# Altium PCB uTCA_MCH_PCB3_template.PcbDoc
Units mm, origin at the board's own origin, x right, y up, seen from the top; angles counter-clockwise.
Board outline 182.75 x 75.8 mm, 2 copper layers (Top Layer, Bottom Layer); 1 components, 0 nets, 291 pads, 0 vias.
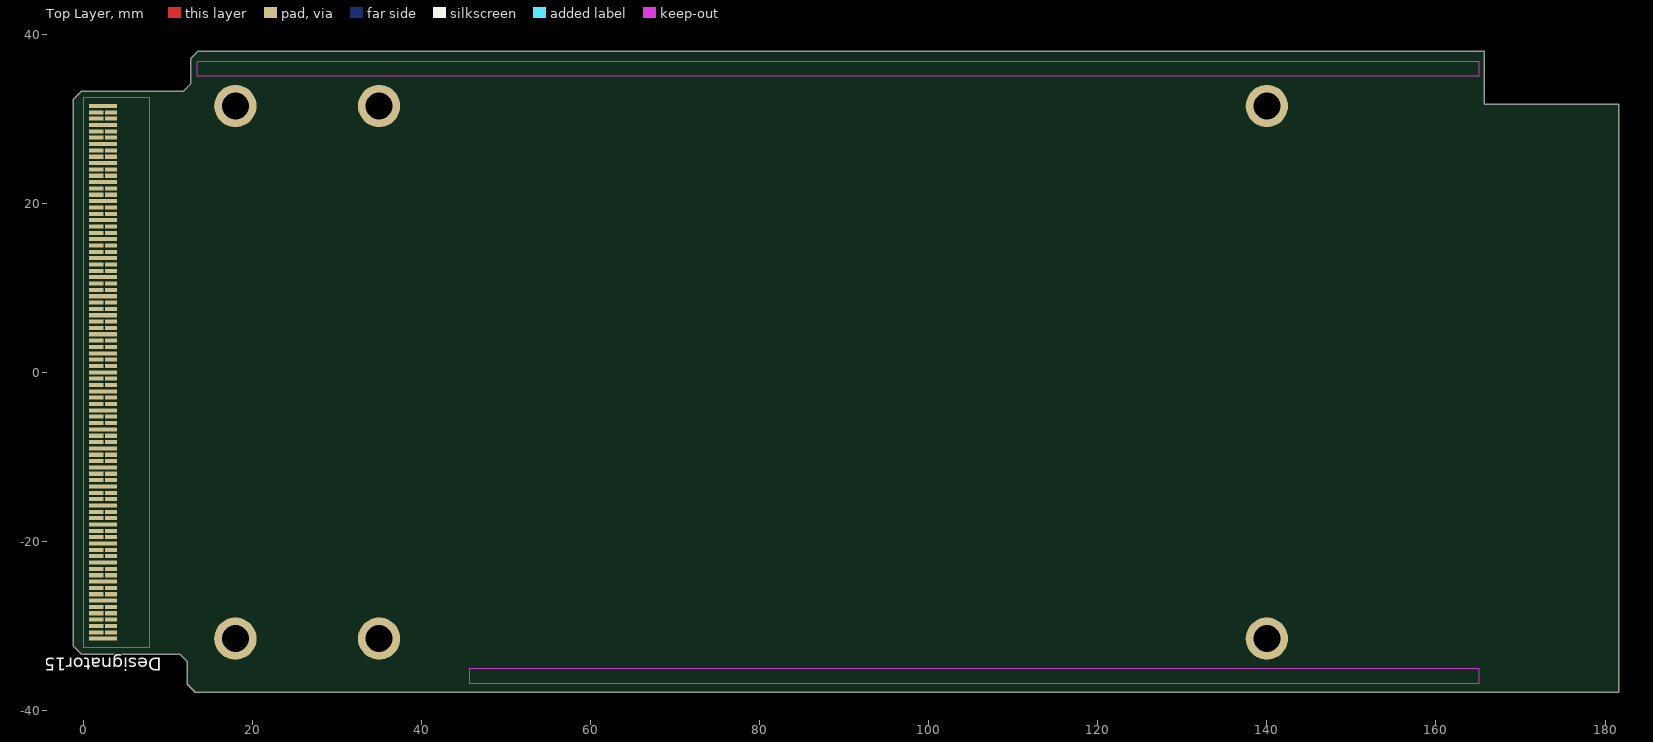
[diagram p0: Top Layer view]
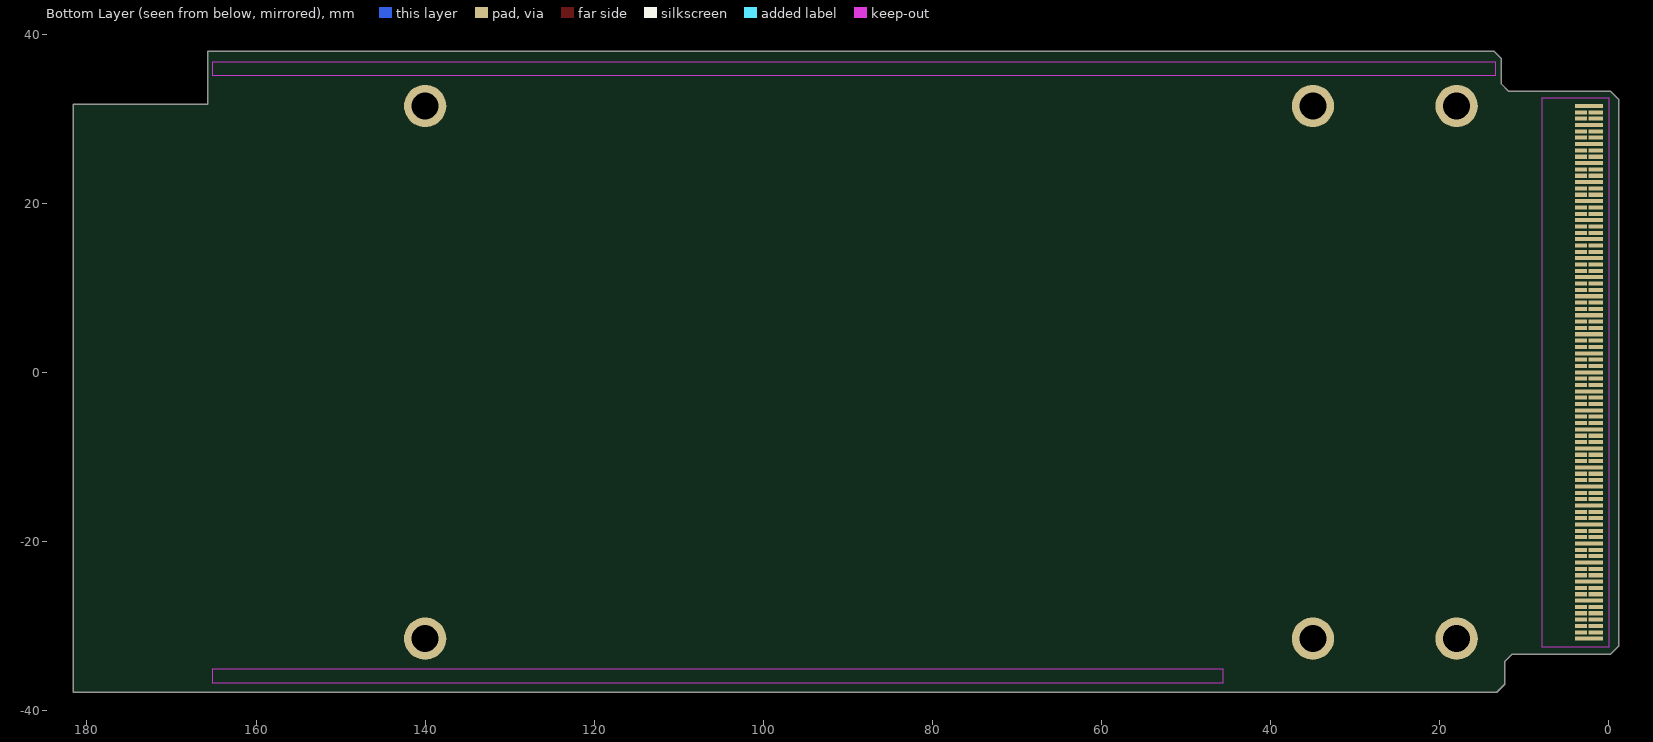
[diagram p1: Bottom Layer view, seen from below]

## Layer stack, top to bottom
Top Layer: signal copper 0.0356
Dielectric: dielectric 0.32, FR-4, Dk 4.8
Bottom Layer: signal copper 0.0356

## Board outline
-1.15,32.3 -0.2,33.25 11.85,33.25 12.75,34.15 12.75,37.15 13.55,37.95 165.7,37.95 165.7,31.7 181.6,31.7 181.6,-37.85 13.25,-37.85 12.3,-36.9 12.3,-34.2 11.45,-33.35 -0.2,-33.35 -1.15,-32.4

## Design rules (kind name [scope] priority, off if disabled: settings)
Clearance [All] p1: gap=0.254
HoleSize [All] p1: absolutevalues=TRUE maxlimit=3 minlimit=0.025 maxpercent=80.000 minpercent=20.000
PolygonConnect [All] p1: connectstyle=Relief reliefconductorwidth=0.254 reliefentries=4 polygonreliefangle="90 Angle"
RoutingVias [All] p1: holewidth=0.711 width=1.27 viastyle="Through Hole" minholewidth=0.711 minwidth=1.27 maxholewidth=0.711 maxwidth=1.27
SolderMaskExpansion [All] p1: expansion=0.102
TestPointUsage [All] p1: valid=0 allowmultiple=FALSE
Testpoint [All] p1: side=15 testpointundercomponent=TRUE minsize=1.016 maxsize=2.54 preferedsize=1.524 minholesize=0 maxholesize=1.016 preferedholesize=0.813 testpointgrid=0.025 style=1023 order=0-112345678
Width [All] p1: maxlimit=0.254 minlimit=0.254 preferedwidth=0.254
18 further rules are at their usual default settings.

## Components (designator, comment, footprint, x,y, rotation, side; value= is the part's Value field where it differs from the comment)
Designator15 "Comment" UTCA_MCH_TONGUE2_3_4 0,0 r0 top locked

## Footprints (in the part's own frame and the unit in brackets; to place one, negate y for a bottom-side part, rotate by r counter-clockwise, add the part's x,y. Pads: shape width x height; smd on the part's side, far side on the other; paste and mask are expansions set on the pad)
UTCA_MCH_TONGUE2_3_4 [mm] "uTCA MTCA.0 MCH tongue connector"
  rect 3.3x0.48 smd: 1(2.35,-31.5) 7(2.35,-27) 10(2.35,-24.75) 13(2.35,-22.5) 16(2.35,-20.25) 19(2.35,-18) 22(2.35,-15.75) 25(2.35,-13.5) 28(2.35,-11.25) 31(2.35,-9) 34(2.35,-6.75) 37(2.35,-4.5) 40(2.35,-2.25) 43(2.35,0) 46(2.35,2.25) 49(2.35,4.5) 52(2.35,6.75) 55(2.35,9) 58(2.35,11.25) 61(2.35,13.5) 64(2.35,15.75) 67(2.35,18) 70(2.35,20.25) 73(2.35,22.5) 76(2.35,24.75) 79(2.35,27) 82(2.35,29.25) 85(2.35,31.5)
  rect 1.4x0.48 smd: 2(3.3,-30.75) 3(3.3,-30) 4(3.3,-29.25) 5(3.3,-28.5) 6(3.3,-27.75) 8(3.3,-26.25) 9(3.3,-25.5) 11(3.3,-24) 12(3.3,-23.25) 14(3.3,-21.75) 15(3.3,-21) 17(3.3,-19.5) 18(3.3,-18.75) 20(3.3,-17.25) 21(3.3,-16.5) 23(3.3,-15) 24(3.3,-14.25) 26(3.3,-12.75) 27(3.3,-12) 29(3.3,-10.5) 30(3.3,-9.75) 32(3.3,-8.25) 33(3.3,-7.5) 35(3.3,-6) 36(3.3,-5.25) 38(3.3,-3.75) 39(3.3,-3) 41(3.3,-1.5) 42(3.3,-0.75) 44(3.3,0.75) 45(3.3,1.5) 47(3.3,3) 48(3.3,3.75) 50(3.3,5.25) 51(3.3,6) 53(3.3,7.5) 54(3.3,8.25) 56(3.3,9.75) 57(3.3,10.5) 59(3.3,12) 60(3.3,12.75) 62(3.3,14.25) 63(3.3,15) 65(3.3,16.5) 66(3.3,17.25) 68(3.3,18.75) 69(3.3,19.5) 71(3.3,21) 72(3.3,21.75) 74(3.3,23.25) 75(3.3,24) 77(3.3,25.5) 78(3.3,26.25) 80(3.3,27.75) 81(3.3,28.5) 83(3.3,30) 84(3.3,30.75)
  rect 1.7x0.48 smd: 3mate(1.55,-30.75) 3mate(1.55,-30) 3mate(1.55,-29.25) 3mate(1.55,-28.5) 3mate(1.55,-27.75) 3mate(1.55,-26.25) 3mate(1.55,-25.5) 3mate(1.55,-24) 3mate(1.55,-23.25) 3mate(1.55,-21.75) 3mate(1.55,-21) 3mate(1.55,-19.5) 3mate(1.55,-18.75) 3mate(1.55,-17.25) 3mate(1.55,-16.5) 3mate(1.55,-15) 3mate(1.55,-14.25) 3mate(1.55,-12.75) 3mate(1.55,-12) 3mate(1.55,-10.5) 3mate(1.55,-9.75) 3mate(1.55,-8.25) 3mate(1.55,-7.5) 3mate(1.55,-6) 3mate(1.55,-5.25) 3mate(1.55,-3.75) 3mate(1.55,-3) 3mate(1.55,-1.5) 3mate(1.55,-0.75) 3mate(1.55,0.75) 3mate(1.55,1.5) 3mate(1.55,3) 3mate(1.55,3.75) 3mate(1.55,5.25) 3mate(1.55,6) 3mate(1.55,7.5) 3mate(1.55,8.25) 3mate(1.55,9.75) 3mate(1.55,10.5) 3mate(1.55,12) 3mate(1.55,12.75) 3mate(1.55,14.25) 3mate(1.55,15) 3mate(1.55,16.5) 3mate(1.55,17.25) 3mate(1.55,18.75) 3mate(1.55,19.5) 3mate(1.55,21) 3mate(1.55,21.75) 3mate(1.55,23.25) 3mate(1.55,24) 3mate(1.55,25.5) 3mate(1.55,26.25) 3mate(1.55,27.75) 3mate(1.55,28.5) 3mate(1.55,30) 3mate(1.55,30.75)
  rect 1.7x0.48 smd far side: 3mate(1.55,-30.75) 3mate(1.55,-30) 3mate(1.55,-29.25) 3mate(1.55,-28.5) 3mate(1.55,-27.75) 3mate(1.55,-26.25) 3mate(1.55,-25.5) 3mate(1.55,-24) 3mate(1.55,-23.25) 3mate(1.55,-21.75) 3mate(1.55,-21) 3mate(1.55,-19.5) 3mate(1.55,-18.75) 3mate(1.55,-17.25) 3mate(1.55,-16.5) 3mate(1.55,-15) 3mate(1.55,-14.25) 3mate(1.55,-12.75) 3mate(1.55,-12) 3mate(1.55,-10.5) 3mate(1.55,-9.75) 3mate(1.55,-8.25) 3mate(1.55,-7.5) 3mate(1.55,-6) 3mate(1.55,-5.25) 3mate(1.55,-3.75) 3mate(1.55,-3) 3mate(1.55,-1.5) 3mate(1.55,-0.75) 3mate(1.55,0.75) 3mate(1.55,1.5) 3mate(1.55,3) 3mate(1.55,3.75) 3mate(1.55,5.25) 3mate(1.55,6) 3mate(1.55,7.5) 3mate(1.55,8.25) 3mate(1.55,9.75) 3mate(1.55,10.5) 3mate(1.55,12) 3mate(1.55,12.75) 3mate(1.55,14.25) 3mate(1.55,15) 3mate(1.55,16.5) 3mate(1.55,17.25) 3mate(1.55,18.75) 3mate(1.55,19.5) 3mate(1.55,21) 3mate(1.55,21.75) 3mate(1.55,23.25) 3mate(1.55,24) 3mate(1.55,25.5) 3mate(1.55,26.25) 3mate(1.55,27.75) 3mate(1.55,28.5) 3mate(1.55,30) 3mate(1.55,30.75)
  rect 3.3x0.48 smd far side: 86(2.35,31.5) 89(2.35,29.25) 92(2.35,27) 95(2.35,24.75) 98(2.35,22.5) 101(2.35,20.25) 104(2.35,18) 107(2.35,15.75) 110(2.35,13.5) 113(2.35,11.25) 116(2.35,9) 119(2.35,6.75) 122(2.35,4.5) 125(2.35,2.25) 128(2.35,0) 131(2.35,-2.25) 134(2.35,-4.5) 137(2.35,-6.75) 140(2.35,-9) 143(2.35,-11.25) 146(2.35,-13.5) 149(2.35,-15.75) 152(2.35,-18) 155(2.35,-20.25) 158(2.35,-22.5) 161(2.35,-24.75) 164(2.35,-27) 170(2.35,-31.5)
  rect 1.4x0.48 smd far side: 87(3.3,30.75) 88(3.3,30) 90(3.3,28.5) 91(3.3,27.75) 93(3.3,26.25) 94(3.3,25.5) 96(3.3,24) 97(3.3,23.25) 99(3.3,21.75) 100(3.3,21) 102(3.3,19.5) 103(3.3,18.75) 105(3.3,17.25) 106(3.3,16.5) 108(3.3,15) 109(3.3,14.25) 111(3.3,12.75) 112(3.3,12) 114(3.3,10.5) 115(3.3,9.75) 117(3.3,8.25) 118(3.3,7.5) 120(3.3,6) 121(3.3,5.25) 123(3.3,3.75) 124(3.3,3) 126(3.3,1.5) 127(3.3,0.75) 129(3.3,-0.75) 130(3.3,-1.5) 132(3.3,-3) 133(3.3,-3.75) 135(3.3,-5.25) 136(3.3,-6) 138(3.3,-7.5) 139(3.3,-8.25) 141(3.3,-9.75) 142(3.3,-10.5) 144(3.3,-12) 145(3.3,-12.75) 147(3.3,-14.25) 148(3.3,-15) 150(3.3,-16.5) 151(3.3,-17.25) 153(3.3,-18.75) 154(3.3,-19.5) 156(3.3,-21) 157(3.3,-21.75) 159(3.3,-23.25) 160(3.3,-24) 162(3.3,-25.5) 163(3.3,-26.25) 165(3.3,-27.75) 166(3.3,-28.5) 167(3.3,-29.25) 168(3.3,-30) 169(3.3,-30.75)
  rect 1.4x0.48 on Bottom Solder: 138(3.3,-7.5)
  Keep-Out Layer region: 0,-32.5 7.9,-32.5 7.9,32.5 0,32.5

## Free pads (board coordinates)
  round 5 hole 3.2 unplated: ""(18,-31.5) ""(18,31.5) ""(35,-31.5) ""(35,31.5) ""(140,-31.5) ""(140,31.5)

## Nets (pads, with @x,y where several pads share a name; then routed paths per layer and width w, separated by ;. In a path a pad name is that pad's centre, name@x,y a point inside that pad or via, vN(x,y) a via of type N, cw(c..) or ccw(c..) an arc to the next point about the centre after c; other vN are vias at no path point)
pads on no net: Designator15.1 Designator15.2 Designator15.3 Designator15.3mate Designator15.4 Designator15.5 Designator15.6 Designator15.7 Designator15.8 Designator15.9 Designator15.10 Designator15.11 Designator15.12 Designator15.13 Designator15.14 Designator15.15 Designator15.16 Designator15.17 Designator15.18 Designator15.19 Designator15.20 Designator15.21 Designator15.22 Designator15.23 Designator15.24 Designator15.25 Designator15.26 Designator15.27 Designator15.28 Designator15.29 Designator15.30 Designator15.31 Designator15.32 Designator15.33 Designator15.34 Designator15.35 Designator15.36 Designator15.37 Designator15.38 Designator15.39 Designator15.40 Designator15.41 Designator15.42 Designator15.43 Designator15.44 Designator15.45 Designator15.46 Designator15.47 Designator15.48 Designator15.49 Designator15.50 Designator15.51 Designator15.52 Designator15.53 Designator15.54 Designator15.55 Designator15.56 Designator15.57 Designator15.58 Designator15.59 Designator15.60 Designator15.61 Designator15.62 Designator15.63 Designator15.64 Designator15.65 Designator15.66 Designator15.67 Designator15.68 Designator15.69 Designator15.70 Designator15.71 Designator15.72 Designator15.73 Designator15.74 Designator15.75 Designator15.76 Designator15.77 Designator15.78 Designator15.79 Designator15.80 Designator15.81 Designator15.82 Designator15.83 Designator15.84 Designator15.85 Designator15.86 Designator15.87 Designator15.88 Designator15.89 Designator15.90 Designator15.91 Designator15.92 Designator15.93 Designator15.94 Designator15.95 Designator15.96 Designator15.97 Designator15.98 Designator15.99 Designator15.100 Designator15.101 Designator15.102 Designator15.103 Designator15.104 Designator15.105 Designator15.106 Designator15.107 Designator15.108 Designator15.109 Designator15.110 Designator15.111 Designator15.112 Designator15.113 Designator15.114 Designator15.115 Designator15.116 Designator15.117 Designator15.118 Designator15.119 Designator15.120 Designator15.121 Designator15.122 Designator15.123 Designator15.124 Designator15.125 Designator15.126 Designator15.127 Designator15.128 Designator15.129 Designator15.130 Designator15.131 Designator15.132 Designator15.133 Designator15.134 Designator15.135 Designator15.136 Designator15.137 Designator15.138 Designator15.139 Designator15.140 Designator15.141 Designator15.142 Designator15.143 Designator15.144 Designator15.145 Designator15.146 Designator15.147 Designator15.148 Designator15.149 Designator15.150 Designator15.151 Designator15.152 Designator15.153 Designator15.154 Designator15.155 Designator15.156 Designator15.157 Designator15.158 Designator15.159 Designator15.160 Designator15.161 Designator15.162 Designator15.163 Designator15.164 Designator15.165 Designator15.166 Designator15.167 Designator15.168 Designator15.169 Designator15.170

## Keep-outs
Keep-Out Layer:
  rectangle: 45.65,-36.78 165.15,-35.05
  rectangle: 13.45,35.06 165.15,36.75

## Silkscreen, mask and mechanical layers (free items; w line width, h text height)
Mechanical 1:
  lines w0.01: 9.271,-32.5 12.45,-32.5 cw(c12.45,-33.5) 13.45,-33.5 13.45,-34.55 ccw(c13.95,-34.55) 13.95,-35.05 45.6,-35.05 cw(c45.6,-35.375) 45.6,-35.7 45.6,-36.25 ccw(c46.1,-36.25) 46.1,-36.75 158,-36.75 165.15,-36.75 165.15,-29.3 168.9,-29.3 ; 9.55,32.5 12.434,32.5 ; 12.4,32.5 ccw(c12.425,33.525) 13.45,33.5 13.45,36.25 cw(c13.95,36.25) 13.95,36.75 165.15,36.75 165.15,31.25 165.2,31.25 180.6,31.25 180.6,-29.3 167.95,-29.3
Mechanical 15:
  circle w0.01: c6.75,-31.5 r0.206
  circle w0.01: c6.75,31.5 r0.212
  lines w0.01: 6.35,-31.5 7.2,-31.5 ; 6.35,31.5 7.2,31.5 ; 6.75,-31.9 6.75,-31.1 ; 6.75,31.1 6.75,31.9
  text "MCH PCB3" at 49.35,-4.9 h10
  text "Edge connector markings" at 9.95,-32.1 h0.7